# EAGLE board PCB_3ph_MOSFET_Bridge (EAGLE 9.7.0)
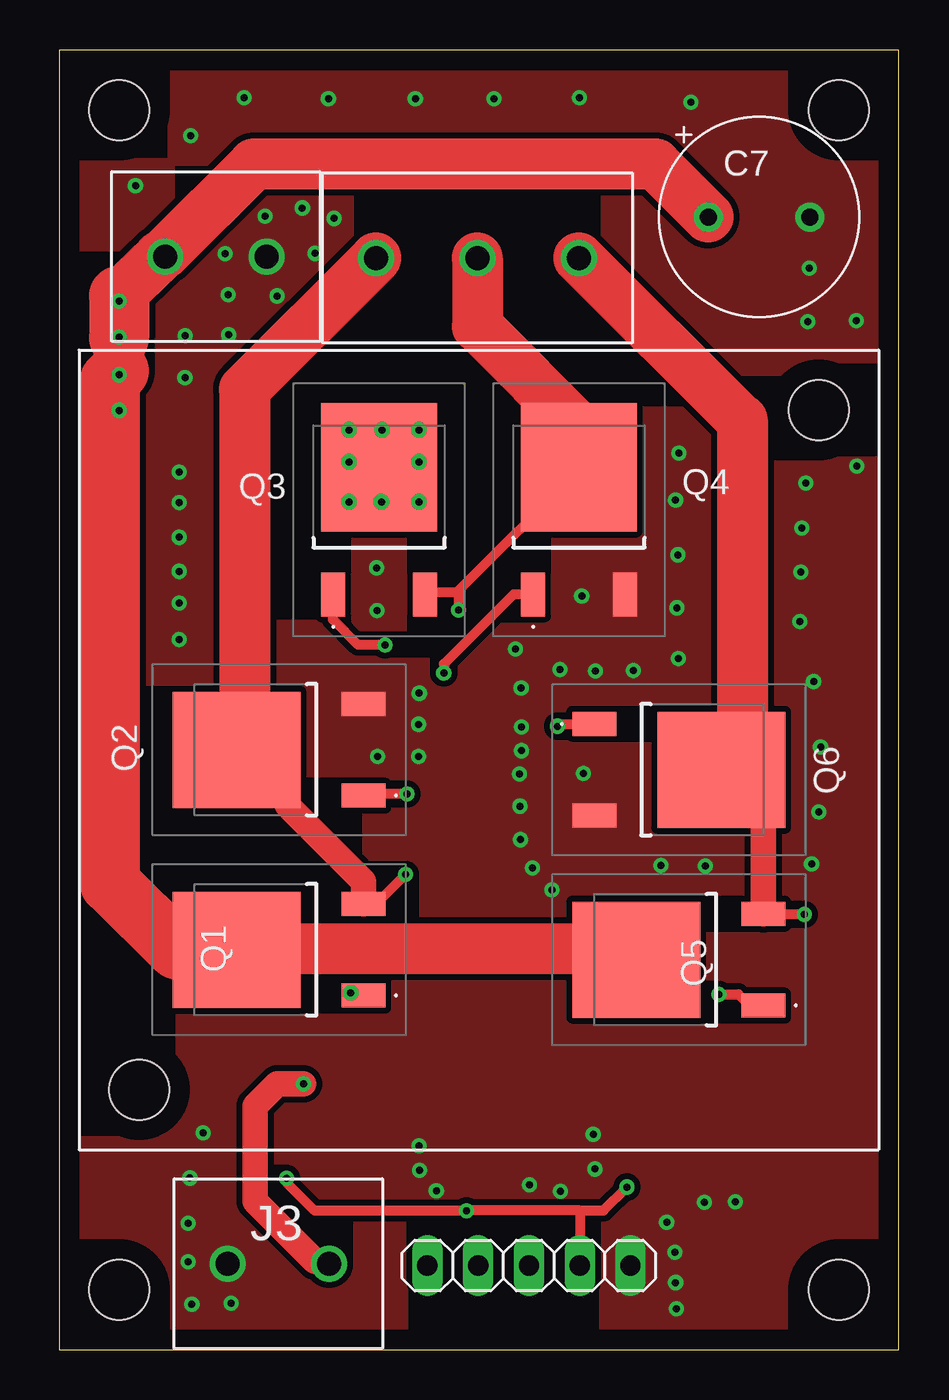
[diagram p0: board, top side]
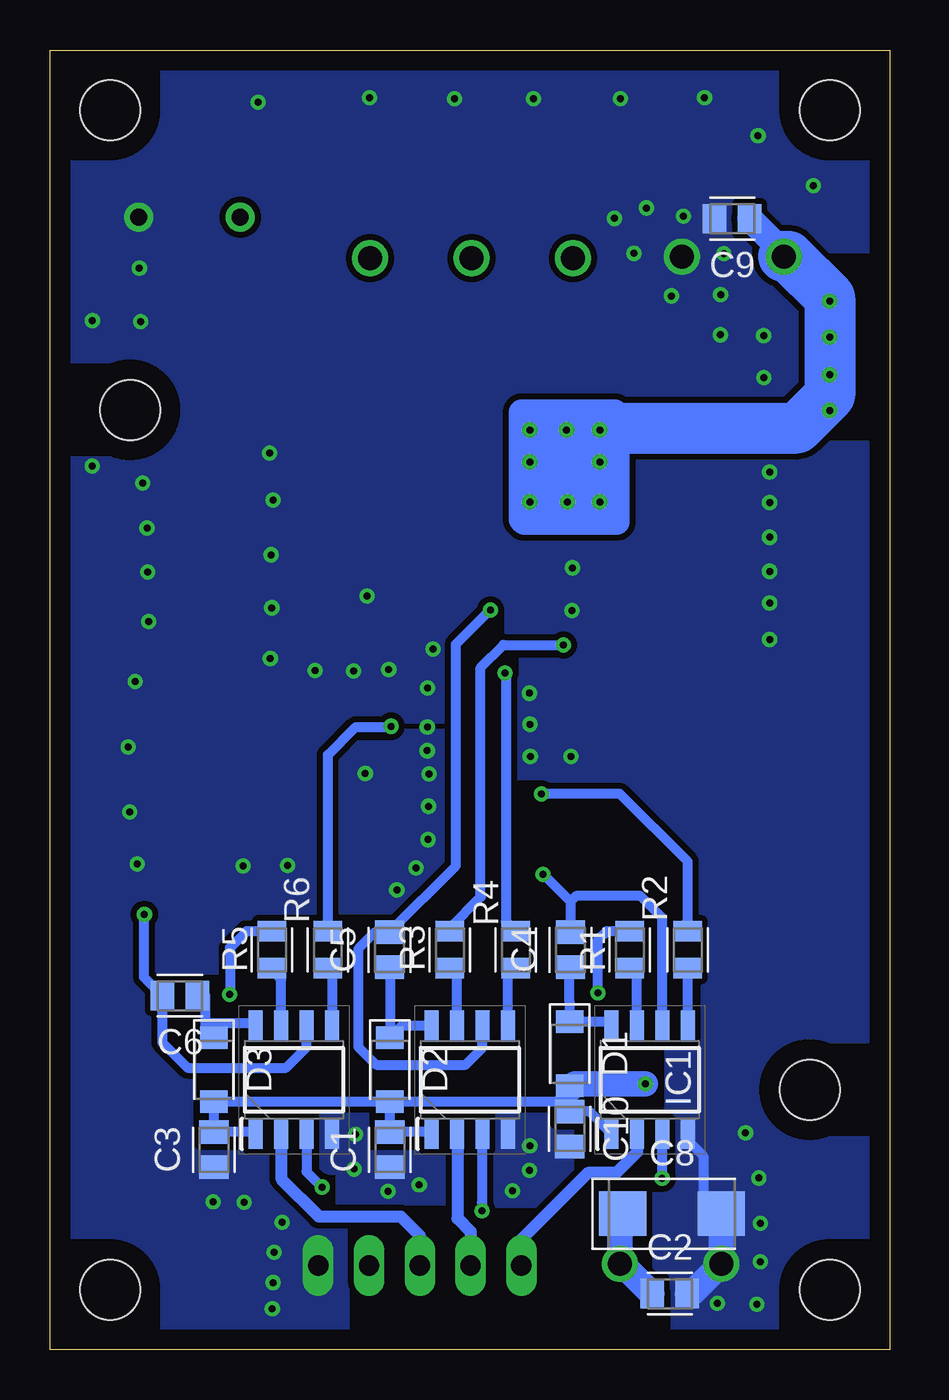
[diagram p1: board, bottom side, seen from below]

Size 42 x 65 mm. Coordinates in mm from the lower left corner, seen from the top.
Outline: 0,0 42,0 42,65 0,65 0,0
Copper layers (1*16): Top 0.035mm / dielectric 1.5mm / Bottom 0.035mm
Design rules "Fusion Electronics Design Rules": minimum track width 6mil, minimum drill 0.35mm, track to track 6mil, track to pad 6mil, pad to pad 6mil, via to via 6mil, smd to smd 6mil, copper to edge 40mil, drill to drill 6mil, minimum pad ring 10mil, minimum via ring 8mil, stop-mask expansion 4mil, vias tented up to drill 9999mil, thermal gap 10mil
Holes 3 mm at 3,3 39,3 3,62 39,62 38,47 4,13

## Footprints (pad centres in the part's own frame; a part is rotated, then mirrored left to right if it is on the bottom)
CAPC2012X110 = smd 1.165 x 1.465: 1 -0.875,0; 2 0.875,0
CAPPRD508W65D1000H1100B = drill 0.85 pad 1.45: 1 -2.54,0; 2 2.54,0
CAPMP6032X280N = smd 2.368 x 2.204: 1 -2.471,0; 2 2.471,0
SODFL3718X115 = smd 1.115 x 1.361: 1 -1.6,0; 2 1.6,0
SOIC127P600X175-8N = smd 1.525 x 0.7: 1 -2.712,1.905; 2 -2.712,0.635; 3 -2.712,-0.635; 4 -2.712,-1.905; 5 2.712,-1.905; 6 2.712,-0.635; 7 2.712,0.635; 8 2.712,1.905
TERMBLK_508-3N = drill 1.2: 1 0,0; 2 5.08,0; 3 10.16,0
TERMBLK_508-2N = drill 1.2: 1 0,0; 2 5.08,0
1X05 = drill 1.016 long: 1 -5.08,0; 2 -2.54,0; 3 0,0; 4 2.54,0; 5 5.08,0
IRLR7843TRPBF = smd 1.2 x 2.2: 1 -2.29,-4.225; 3 2.29,-4.225 | smd 5.8 x 6.4: 2 0,2.125
RESC2012X65 = smd 1.031 x 1.42: 1 -0.919,0; 2 0.919,0

## Placement (x,y rotation side)
C1  [CAPC2012X110]  25,10 90 bottom
C2  [CAPC2012X110]  11,2.8 0 bottom
C3  [CAPC2012X110]  33.8,10 90 bottom
C4  [CAPC2012X110]  15.96,20 90 bottom
C5  [CAPC2012X110]  25.02,20 90 bottom
C6  [CAPC2012X110]  35.5,17.7 180 bottom
C7  [CAPPRD508W65D1000H1100B]  35.02,56.64 0 top
C8  [CAPMP6032X280N]  10.89,6.8 0 bottom
C9  [CAPC2012X110]  7.87,56.57 180 bottom
C10  [CAPC2012X110]  16,11.03 270 bottom
D1  MBR0520LT1G  [SODFL3718X115]  16,14.8 270 bottom
D2  MBR0520LT1G  [SODFL3718X115]  25,14 270 bottom
D3  MBR0520LT1G  [SODFL3718X115]  33.8,14 270 bottom
IC1  IR2104STRPBF  [SOIC127P600X175-8N]  12,13.5 90 bottom
IC2  IR2104STRPBF  [SOIC127P600X175-8N]  21,13.5 90 bottom
IC3  IR2104STRPBF  [SOIC127P600X175-8N]  29.8,13.5 90 bottom
J1  TERM-BLK-3P  [TERMBLK_508-3N]  26,54.6 180 top
J2  TERM-BLK-2P  [TERMBLK_508-2N]  5.3,54.67 0 top
J3  TERM-BLK-2P  [TERMBLK_508-2N]  13.5,4.3 180 top
JP1  PINHD-1X5  [1X05]  23.5,4.2 180 top
Q1  IRLR7843TRPBF  [IRLR7843TRPBF]  11,20 90 top
Q2  IRLR7843TRPBF  [IRLR7843TRPBF]  11,30 90 top
Q3  IRLR7843TRPBF  [IRLR7843TRPBF]  16,42 0 top
Q4  IRLR7843TRPBF  [IRLR7843TRPBF]  26,42 0 top
Q5  IRLR7843TRPBF  [IRLR7843TRPBF]  31,19.5 90 top
Q6  IRLR7843TRPBF  [IRLR7843TRPBF]  31,29 270 top
R1  [RESC2012X65]  13,20 90 bottom
R2  [RESC2012X65]  10.1,20 90 bottom
R3  [RESC2012X65]  22,20 90 bottom
R4  [RESC2012X65]  18.7,20 90 bottom
R5  [RESC2012X65]  30.9,20 90 bottom
R6  [RESC2012X65]  28.1,20 90 bottom

## Library data of the parts
C1-C6 C9 C10 = Tinkercad; CATEGORY: Capacitor
C7 C8 = Capacitor; CATEGORY: Capacitor
D1-D3 = Diode; CATEGORY: Diode; DESCRIPTION: DIODE SCHOTTKY 20V 500MA SOD123; MANUFACTURER: ON Semiconductor; MPN: MBR0520LT1G; SUB-CATEGORY: Schottky
IC1-IC3 = IR2104S; DESCRIPTION: MOSFET Driver, Dual, 8 Pin, Plastic, SOP; HEIGHT: 1.75mm; MANUFACTURER_NAME: Infineon; MANUFACTURER_PART_NUMBER: IR2104STRPBF; MOUSER_PART_NUMBER: 942-IR2104STRPBF; MOUSER_PRICE-STOCK: https://www.mouser.co.uk/ProductDetail/Infineon-Technologies/IR2104STRPBF?qs=2r01AXMCG3NCbspWVHqTYw%3D%3D
J1 = Connector; CATEGORY: Connector; DESCRIPTION: TERM BLK 3P SIDE ENT 5.08mm PCB; MANUFACTURER: TE Connectivity; MPN: 282837-3; OPERATING_TEMPERATURE: -40°C to +105°C; PART_STATUS: Active; PITCH: 0.200" (5.08mm); ROHS_COMPLIANCE: RoHS Compliant; SERIES: Buchanan; SUBCATEGORY: Terminal Block; TYPE: Side Wire Entry
J2 J3 = Connector; CATEGORY: Fixed Terminal Blocks; DESCRIPTION: Fixed Terminal Blocks 5.08MM PCB MOUNT 2P; MANUFACTURER: TE Connectivity AMP Connectors; MPN: 282837-2; OPERATING_TEMPERATURE: -40°C to +105°C; PART_STATUS: ACTIVE; PITCH: 0.200" (5.08mm); ROHS_COMPLIANCE: RoHS Compliant; SERIES: Buchanan; SUBCATEGORY: Terminal Blocks; TYPE: Through Hole; Screw - Rising Cage Clamp; Side wire entry, Horizontal with Board
JP1 = Connector; CATEGORY: Headers; DESCRIPTION: Header, Straight, 5 Position; MANUFACTURER: Generic; MPN: Generic; OPERATING_TEMPERATURE: Generic; PART_STATUS: Active; PITCH: 0.100" (2.54mm); ROHS_COMPLIANCE: Generic; SERIES: Generic; SUB-CATEGORY: Headers, Male Pins; TYPE: Board to Board or Cable, Unshrouded, Through Hole, Straight
Q1-Q6 = IRLR7843TRPBF; DESCRIPTION: N-Channel 30 V 161A (Tc) 140W (Tc) Surface Mount TO-252AA (DPAK); HEIGHT: 2.52mm; MANUFACTURER_NAME: Infineon; MANUFACTURER_PART_NUMBER: IRLR7843TRPBF; MOUSER_PART_NUMBER: 942-IRLR7843TRPBF; MOUSER_PRICE-STOCK: https://www.mouser.co.uk/ProductDetail/Infineon-Technologies/IRLR7843TRPBF?qs=Z8%252BeY1k3TIIgO44qG7em9Q%3D%3D
R1-R6 = Tinkercad; CATEGORY: Resistor; SUB-CATEGORY: Fixed

## Nets
0V: C1.1 C2.2 C3.1 C7.2 C8.2 C9.2 C10.2 IC1.4 IC2.4 IC3.4 J2.2 J3.2 JP1.1 Q2.3 Q4.3 Q6.3
+12V: C1.2 C2.1 C3.2 C8.1 C10.1 D1.2 D2.2 D3.2 IC1.1 IC2.1 IC3.1 J3.1
N$1: C4.2 IC1.6 J1.3 Q1.3 Q2.2
N$2: C5.2 IC2.6 J1.2 Q3.3 Q4.2
N$3: C6.2 IC3.6 J1.1 Q5.3 Q6.2
N$4: Q1.1 R1.2
N$5: Q2.1 R2.2
N$6: Q3.1 R3.2
N$7: Q4.1 R4.2
N$8: Q5.1 R5.2
N$9: Q6.1 R6.2
N$10: IC1.7 R1.1
N$11: IC1.5 R2.1
N$12: IC2.7 R3.1
N$13: IC2.5 R4.1
N$14: IC3.7 R5.1
N$15: IC3.5 R6.1
N$16: IC1.3 IC2.3 IC3.3 JP1.2
N$17: IC1.2 JP1.5
N$18: IC2.2 JP1.4
N$19: IC3.2 JP1.3
N$20: C4.1 D1.1 IC1.8
N$21: C5.1 D2.1 IC2.8
N$22: C6.1 D3.1 IC3.8
V+: C7.1 C9.1 J2.1 Q1.2 Q3.2 Q5.2

## Tracks (layer width: path | path; a pad name or v marks a point on that pad's centre or on a via)
0V  (via drill 0.35)
  Bottom 0.508: IC1.4 10.1,10.46 9.31,9.68 9.31,6.97 9.14,6.8 C8.2
  Bottom 1.27: C8.2 J3.2 9.92,2.8 C2.2
  other vias: 8.29,54.8 8.45,52.76 8.47,50.75 10.91,52.7 12.8,54.83 13.75,56.58 12.16,57.1 10.31,56.69 30.88,2.04 30.84,3.35 30.8,4.86 30.39,6.37 26.23,28.82 23.12,31.14 23.13,29.95 23.03,28.79 23.05,27.17 23.08,25.5 23.68,24.09 24.65,22.99 23.11,33.09 22.83,35.03 18.01,32.83 17.98,31.27 17.97,29.67 15.89,36.97 15.87,39.1 6,40.63 6,38.92 6,37.34 6,35.51 31,44.84 30.84,42.49 30.95,39.75 37.11,38.88 30.9,37.1 30.98,34.57 37.36,43.33 37.15,41.09 37.06,36.42 37.74,33.41 6.3,50.71 6.29,48.61 6,43.89 6,42.37 25.05,34.02 26.82,33.93 28.73,33.97 38.09,30.13 38.01,26.89 37.64,24.29 39.89,44.18 39.88,51.47 37.45,51.42 37.53,54.09 15.93,29.66 26.14,37.69 8.61,2.31 6.64,2.27 6.45,4.39 6.46,6.31 6.54,8.58 7.2,10.83 18,10.19 18.02,8.97 18.86,7.95 23.53,8.24 25.08,7.91 26.79,9.03 26.71,10.76 33.83,7.39 32.28,7.36 31.59,62.38 26.02,62.61 21.76,62.57 17.82,62.57 13.46,62.57 9.25,62.61 6.58,60.71 3.81,58.22 32.33,24.18 30.11,24.22
  pour Bottom (isolate 0.3, no thermals): 0.62,-1.32 40.45,-1.32 42.32,0.54 42.32,65.68 0.31,65.68 0.61,-1.31
  pour Top (isolate 0.3, no thermals): 0.81,-2.89 39.57,-2.89 43.35,0.88 43.14,66.49 -0.67,66.49 -1.41,65.75 -1.41,-0.68
+12V  (via drill 0.35)
  Top 1.27: J3.1 13.39,4.41 12.79,4.41 9.79,7.41 9.79,12.18 10.89,13.28 v12.22,13.28
  Bottom 0.508: IC1.1 15.02,11.9 C10.1 | C10.1 16,13.01 D1.2 | IC2.1 22.99,10.88 C1.2 D2.2 | IC3.1 31.79,10.88 C3.2 D3.2 D2.2 | C10.1 16.49,12.4 D2.2
  Bottom 1.27: C8.1 13.5,6.66 J3.1 13.38,4.3 C2.1 | v12.22,13.28 15.73,13.28 16,13.01
N$1  (via drill 0.35)
  Top 0.508: v17.33,23.77 15.86,22.29 Q1.3
  Top 1.27: Q1.3 15.22,23.41 11.4,27.23 11.4,27.87 9.27,30 Q2.2
  Top 2.54: 9.27,30 9.27,48.03 J1.3
  Bottom 0.508: 15.96,22.41 C4.2 | 15.96,22.41 17.31,23.77 v17.33,23.77 | IC1.6 11.37,21.59 12.46,22.68 15.69,22.68 15.96,22.41
N$2  (via drill 0.35)
  Top 0.508: 26.3,45.8 26,45.49 Q4.2 26,43.97 19.99,37.96 | 19.99,37.96 19.89,37.86 18.38,37.86 Q3.3 | 19.99,37.96 19.99,37 v19.97,36.98
  Top 2.54: 26.3,45.8 20.92,51.18 J1.2
  Bottom 0.508: IC2.6 20.36,15.09 21.21,14.25 25.69,14.25 26.58,15.14 26.58,20.03 25.73,20.88 C5.2 21.7,24.2 21.7,35.28 19.98,37 v19.97,36.98
N$3  (via drill 0.35)
  Top 0.508: 35.27,21.84 Q5.3 | v37.28,21.77 35.25,21.77 Q5.3
  Top 1.27: 35.22,22.76 35.22,28.89 34.37,29.75 | 35.22,22.76 Q5.3 | Q5.3 35.23,22.76 35.22,22.76
  Top 2.5: 34.37,29.75 Q6.2
  Top 2.54: 34.37,29.75 34.17,29.55 34.17,46.51 34.09,46.51 J1.1
  Bottom 0.508: 29.27,16.31 IC3.6 29.16,15.12 30.19,14.1 35.12,14.1 36.38,15.36 C6.2 37.31,18.64 37.31,21.73 v37.28,21.77
N$4  (via drill 0.35)
  Top 0.508: Q1.1 15.01,17.92 14.68,17.92 v14.59,17.83
  Bottom 0.508: R1.2 14.17,20.92 14.59,20.51 v14.59,17.83
N$5  (via drill 0.35)
  Top 0.508: v17.41,27.79 15.3,27.79 Q2.1
  Bottom 0.508: R2.2 10.1,24.4 13.49,27.79 v17.41,27.79
N$6  (via drill 0.35)
  Top 0.508: v16.3,35.24 14.95,35.24 13.69,36.5 13.69,37.76 Q3.1
  Bottom 0.508: R3.2 22,21.09 20.45,22.64 20.45,34.11 19.32,35.24 v16.3,35.24
N$7  (via drill 0.35)
  Top 0.508: Q4.1 22.73,37.77 19.24,34.29 v19.24,33.84
  Bottom 0.508: R4.2 19.19,21.41 19.19,33.79 v19.24,33.84
N$8  (via drill 0.35)
  Top 0.508: Q5.1 35.11,17.1 34.65,17.1 33.98,17.77 v33.01,17.77
  Bottom 0.508: R5.2 32.17,20.92 33,20.09 33,17.77 v33.01,17.77
N$9  (via drill 0.35)
  Top 0.508: v24.93,31.17 25.05,31.29 Q6.1
  Bottom 0.508: R6.2 28.1,29.74 26.71,31.13 24.93,31.13 v24.93,31.17
N$10
  Bottom 0.508: IC1.7 12.63,18.71 R1.1
N$11
  Bottom 0.508: IC1.5 R2.1
N$12
  Bottom 0.508: IC2.7 21.64,18.71 R3.1
N$13
  Bottom 0.508: IC2.5 19.09,18.69 R4.1
N$14
  Bottom 0.508: IC3.7 30.43,18.52 R5.1
N$15
  Bottom 0.508: IC3.5 27.89,18.88 R6.1
N$16  (via drill 0.35)
  Top 0.508: 28.37,8.12 v28.39,8.12 27.23,6.96 26.04,6.96 | 26.04,6.96 20.39,6.96 v20.38,6.94 12.78,6.94 11.38,8.35 v11.38,8.56 | 26.04,6.96 JP1.2
  Bottom 0.508: v28.39,8.12 29.16,8.89 IC3.3 | IC1.3 11.38,10.78 v11.38,8.56 | IC2.3 20.39,10.76 20.39,7.35 20.38,7.34 v20.38,6.94
N$17
  Bottom 0.61: IC1.2 12.64,9.87 13.67,8.84 15.1,8.84 18.42,5.51 JP1.5
N$18
  Bottom 0.61: JP1.4 20.96,5.89 21.62,6.55 21.62,10.77 IC2.2
N$19
  Bottom 0.61: JP1.3 23.5,5.7 24.46,6.65 28.54,6.65 30.43,8.55 IC3.2
N$20
  Bottom 0.508: IC1.8 14.09,16.4 D1.1 16,17.38 16.01,17.39 16.01,19.08 C4.1
N$21
  Bottom 0.508: IC2.8 24.39,16.21 D2.1 25,19.11 C5.1
N$22
  Bottom 0.508: IC3.8 31.82,16.33 34.12,16.33 34.12,15.92 D3.1 34.23,16.03 34.23,17.7 C6.1
V+  (via drill 0.35)
  Top 0.508: 5.91,20 Q1.2 8.39,20 8.35,20.04
  Top 1.27: v3,46.97 3,48.94 | v3,48.75 3,50.61 v3,52.43 | v3,50.65 3,52.7 | Q3.2 16.08,44.04 16.08,43.49 16,43.58 Q3.2 | Q3.2 14.78,44.12 v14.5,44.4 | 5.02,54.67 J2.1 5.3,54.85
  Top 2.54: 8.35,20.04 28.33,20.04 Q5.2 | C7.1 29.83,59.29 9.74,59.29 5.3,54.85 | 3,52.7 5.02,54.67 | 3,48.94 3,50.61
  Top 3: 5.91,20 2.54,23.3 2.54,48.48 3,48.94 | 3,52.7 3,50.61
  Bottom 1.27: J2.1 5.3,54.87 C9.1 | v14.5,46 13.74,46.76 13.74,46.88 18.41,46.88 18.41,41.52 18.28,41.4 13.64,41.4 13.64,46.09 | v18,46 16.23,46 16.55,45.68 16.55,44.13 15.54,44.13 15.31,44.36 15.31,44.96 15.41,45.06 17.16,45.06 17.19,45.04 17.19,43.32 17.16,43.29 14.61,43.29 14.61,43.3 14.5,43.41 v14.5,46 | v16.15,46 v14.5,46 | v14.5,44.4 v14.5,46 | v18,46 v18,42.4 v14.5,42.4 v16.11,42.4 | v18,44.4 v18,46
  Bottom 2.54: J2.1 5.06,54.67 3,52.61 3,47.72 4.62,46.09 13.64,46.09